# Altium PCB Network.PcbDoc
Units mil, origin at the board's own origin, x right, y up, seen from the top; angles counter-clockwise.
Board outline 6000 x 4000 mil, 2 copper layers (Top Layer, Bottom Layer); 6 components, 10 nets, 18 pads, 0 vias.
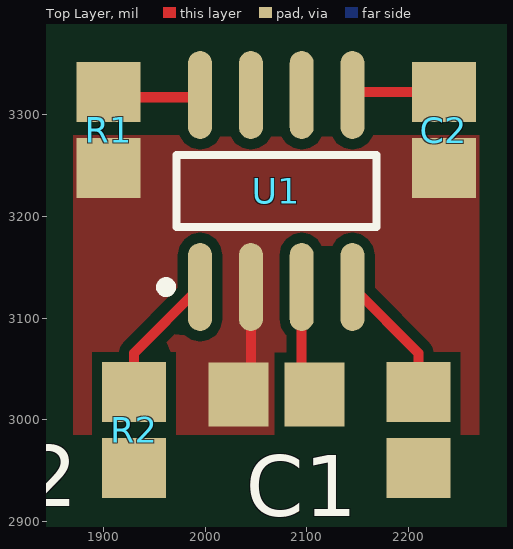
[diagram p0: Top Layer view]
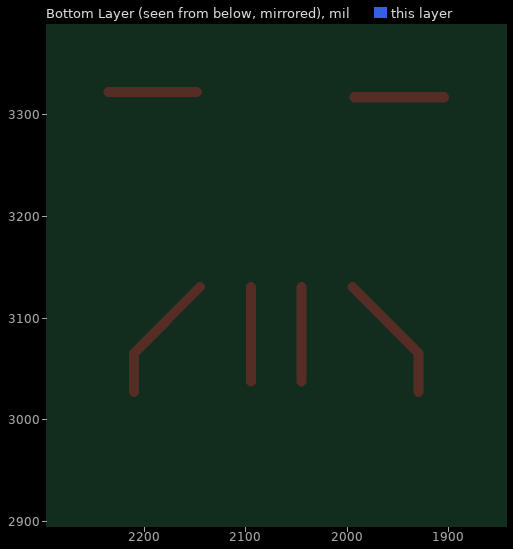
[diagram p1: Bottom Layer view, seen from below]

## Layer stack, top to bottom
Top Layer: signal copper 1.4
Dielectric: dielectric 12.6, FR-4, Dk 4.8
Bottom Layer: signal copper 1.4

## Board outline
1000,1000 7000,1000 7000,5000 1000,5000

## Design rules (kind name [scope] priority, off if disabled: settings)
Clearance [All] p1: gap=10
PlaneConnect [All] p1: planeconnectstyle=Direct reliefexpansion=20 reliefentries=4 reliefconductorwidth=10 reliefairgap=10
PolygonConnect [All] p1: connectstyle=Direct reliefconductorwidth=10 reliefentries=4 polygonreliefangle="90 Angle"
RoutingVias [All] p1: holewidth=28 width=50 viastyle="Through Hole" minholewidth=28 minwidth=50 maxholewidth=28 maxwidth=50
SilkscreenOverComponentPads [All] p1: minsilkscreentomaskgap=10
SolderMaskExpansion [All] p1: expansion=4
Width [All] p1: maxlimit=10 minlimit=10 preferedwidth=10
26 further rules are at their usual default settings.

## Components (designator, comment, footprint, x,y, rotation, side; value= is the part's Value field where it differs from the comment)
C1 "CAP 0.1uF" 0805 2070,3025 r180 top
C2 "CAP 4.7nF" 0805 2235,3285 r270 top
R1 "R_0805_10k_1%" 0805 1905,3285 r90 top
R2 "R_0805_22_1%" 0805 1930,2990 r270 top
R3 "R_0805_22_1%" 0805 2210,2990 r270 top
U1 "U_SN65HVD230" SOIC127P600-8N 2070,3225 r90 top

## Footprints (in the part's own frame and the unit in brackets; to place one, negate y for a bottom-side part, rotate by r counter-clockwise, add the part's x,y. Pads: shape width x height; smd on the part's side, far side on the other; paste and mask are expansions set on the pad)
0805 [mm] "0805 Resistor/Capacitor"
  rect 1.5x1.6 smd: 1(-0.95,0) 2(0.95,0)
  body extent -1.1,-0.72 1.1,0.72, height 1.1
SOIC127P600-8N [mm] "SOIC, 8-Leads, Body 4.9x3.9mm, Pitch 1.27mm, IPC Medium Density"
  oval 2.2x0.6 smd: 1(-2.4,1.905) 2(-2.4,0.635) 3(-2.4,-0.635) 4(-2.4,-1.905) 5(2.4,-1.905) 6(2.4,-0.635) 7(2.4,0.635) 8(2.4,1.905)
  silkscreen extent -2.52,-2.5 0.9,2.88, body extent -2,-2.5 2,2.5, height 1.75

## Part data
C1: library part C_0805_0.1uF_1, "CAP CERM 0.1uF"
C2: library part C_0805_4.7nF, "CAP CERM 4.7NF"
R1: library part R_0805_10K_1%, "RES 10K OHM 1/8W 1% 0805 SMD"
R2 R3: "RES 22 OHM 1/8W 1% 0805 SMD"
U1: "CAN Transciever"

## Nets (pads, with @x,y where several pads share a name; then routed paths per layer and width w, separated by ;. In a path a pad name is that pad's centre, name@x,y a point inside that pad or via, vN(x,y) a via of type N, cw(c..) or ccw(c..) an arc to the next point about the centre after c; other vN are vias at no path point)
+3.3D: C1.1 U1.3 | length 93.1
  Top Layer w10: C1.1@2095,3037.4 U1.3
CANH: U1.7
CANL: U1.6
DGND: C1.2 C2.2 R1.1 U1.2 | length 93.1
  Top Layer w10: C1.2@2045,3037.4 U1.2
NetC2_1: C2.1 U1.5 | length 87.1
  Top Layer w10: U1.5@2147.91,3322.4 C2.1
NetR1_2: R1.2 U1.8 | length 87.9
  Top Layer w10: R1.2@1905,3317.4 U1.8@1992.91,3317.4
NetR2_1: R2.1 U1.1 | length 130
  Top Layer w10: R2.1 1930,3065.51 U1.1
NetR3_1: R3.1 U1.4 | length 130
  Top Layer w10: U1.4 2210,3065.51 R3.1
RXCAN: R3.2
TXCAN: R2.2

## Polygon pours and split planes (outlines as drawn)
DGND on Top Layer "Top Layer-No Net" (solid, remove dead copper, pour order 1000): 1870,3280 2270,3280 2270,2985 1870,2985